# Allegro board COMPLETE SCHEMATIC V4.brd
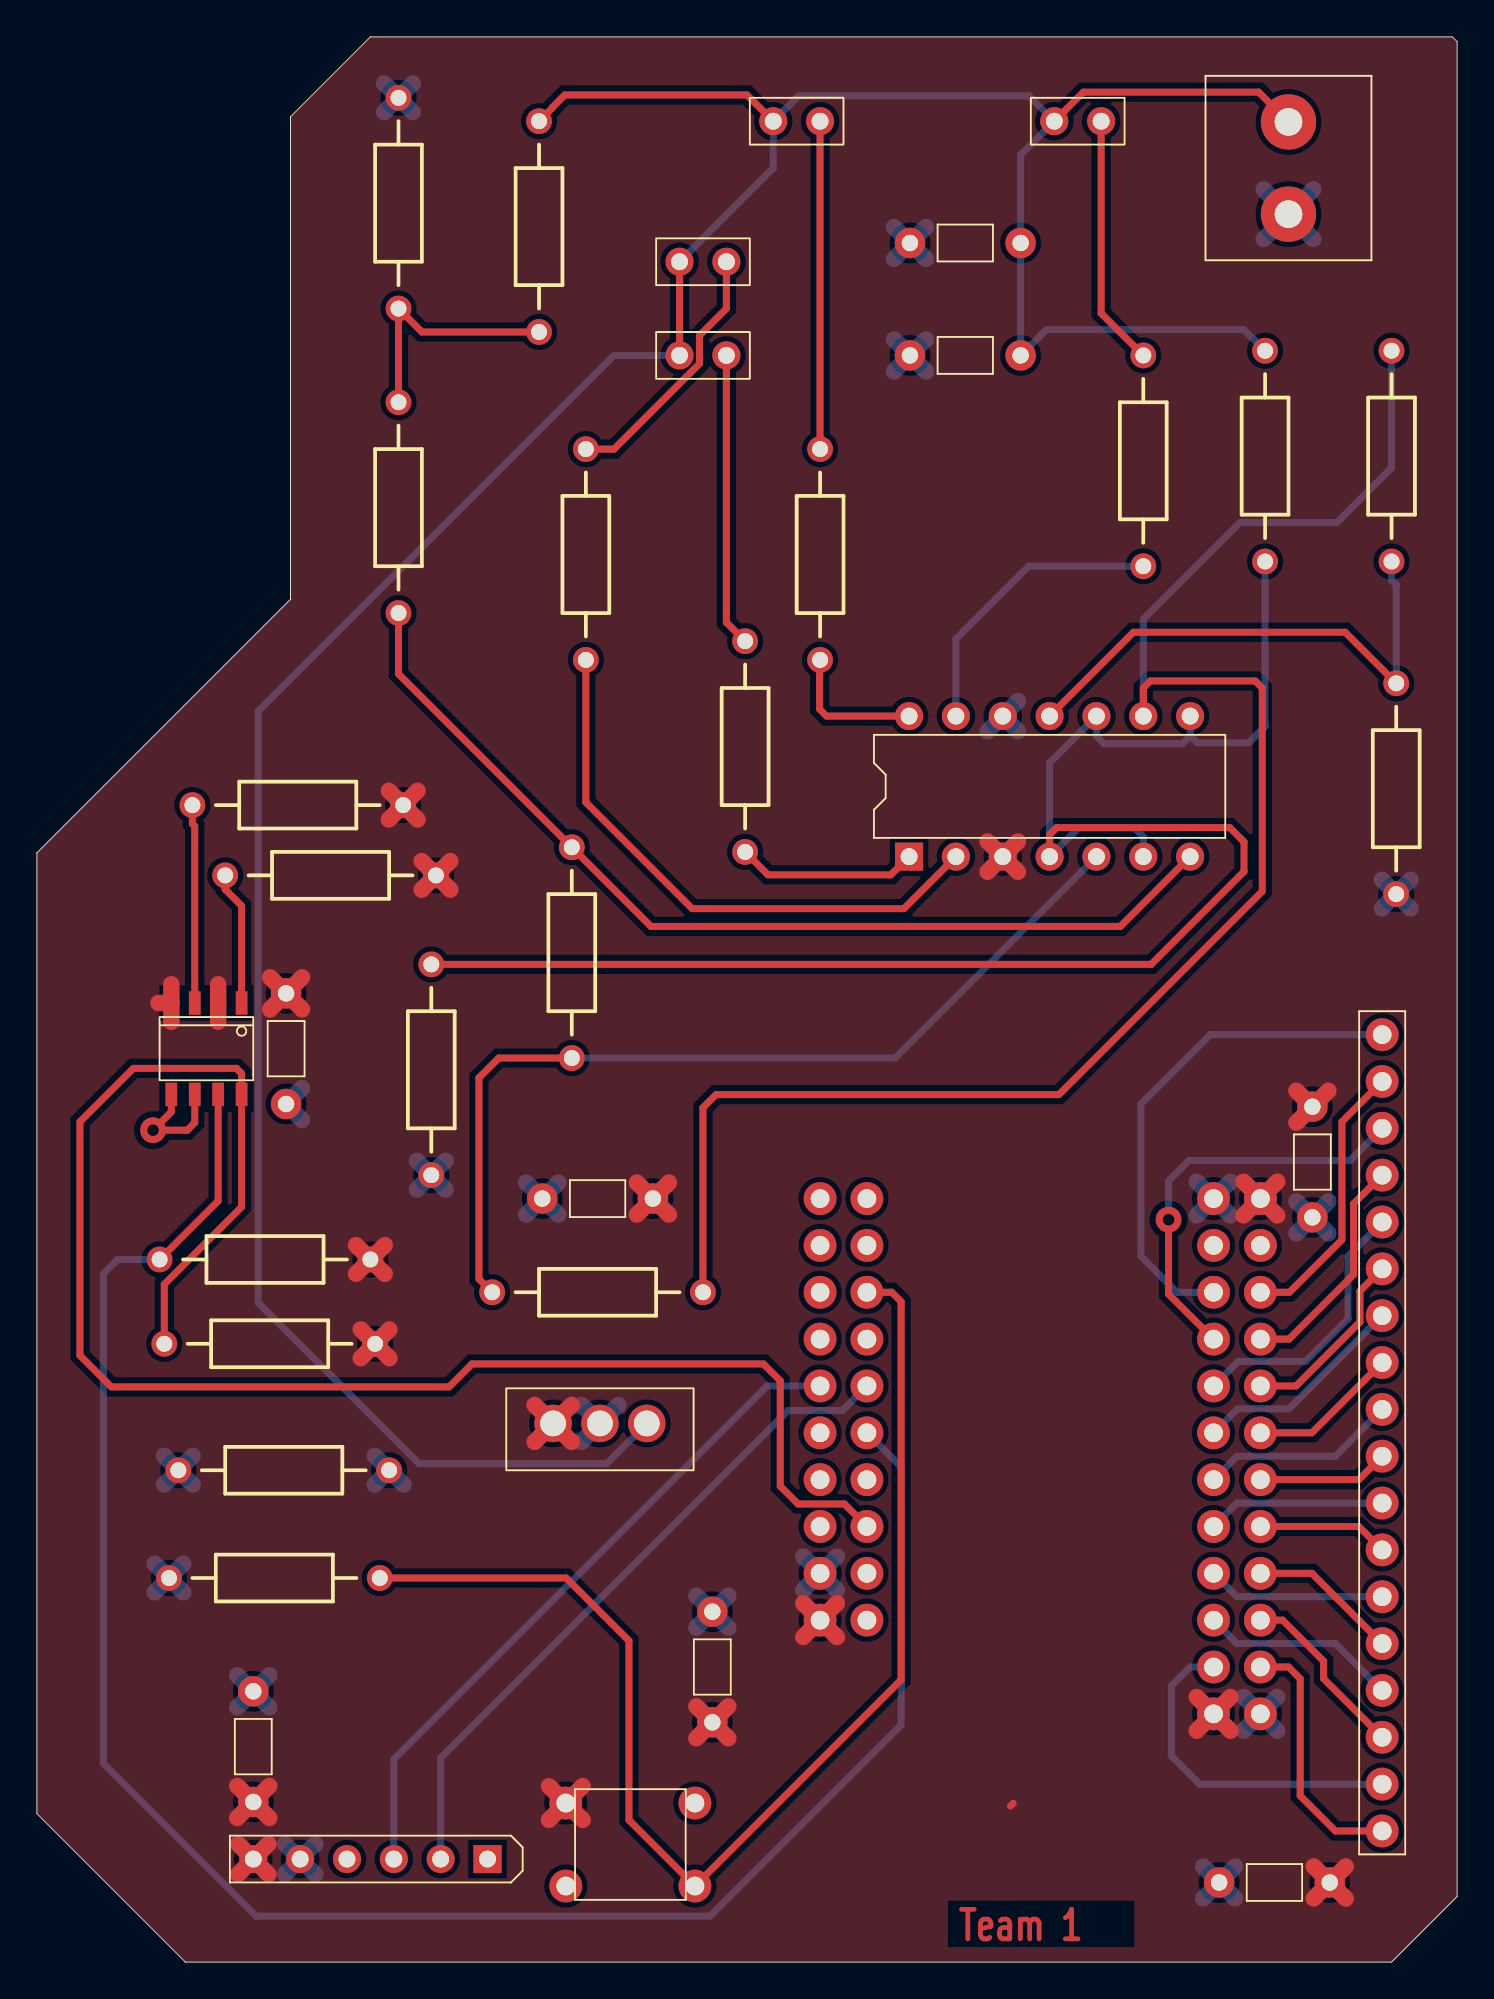
[diagram p0: board, top side]
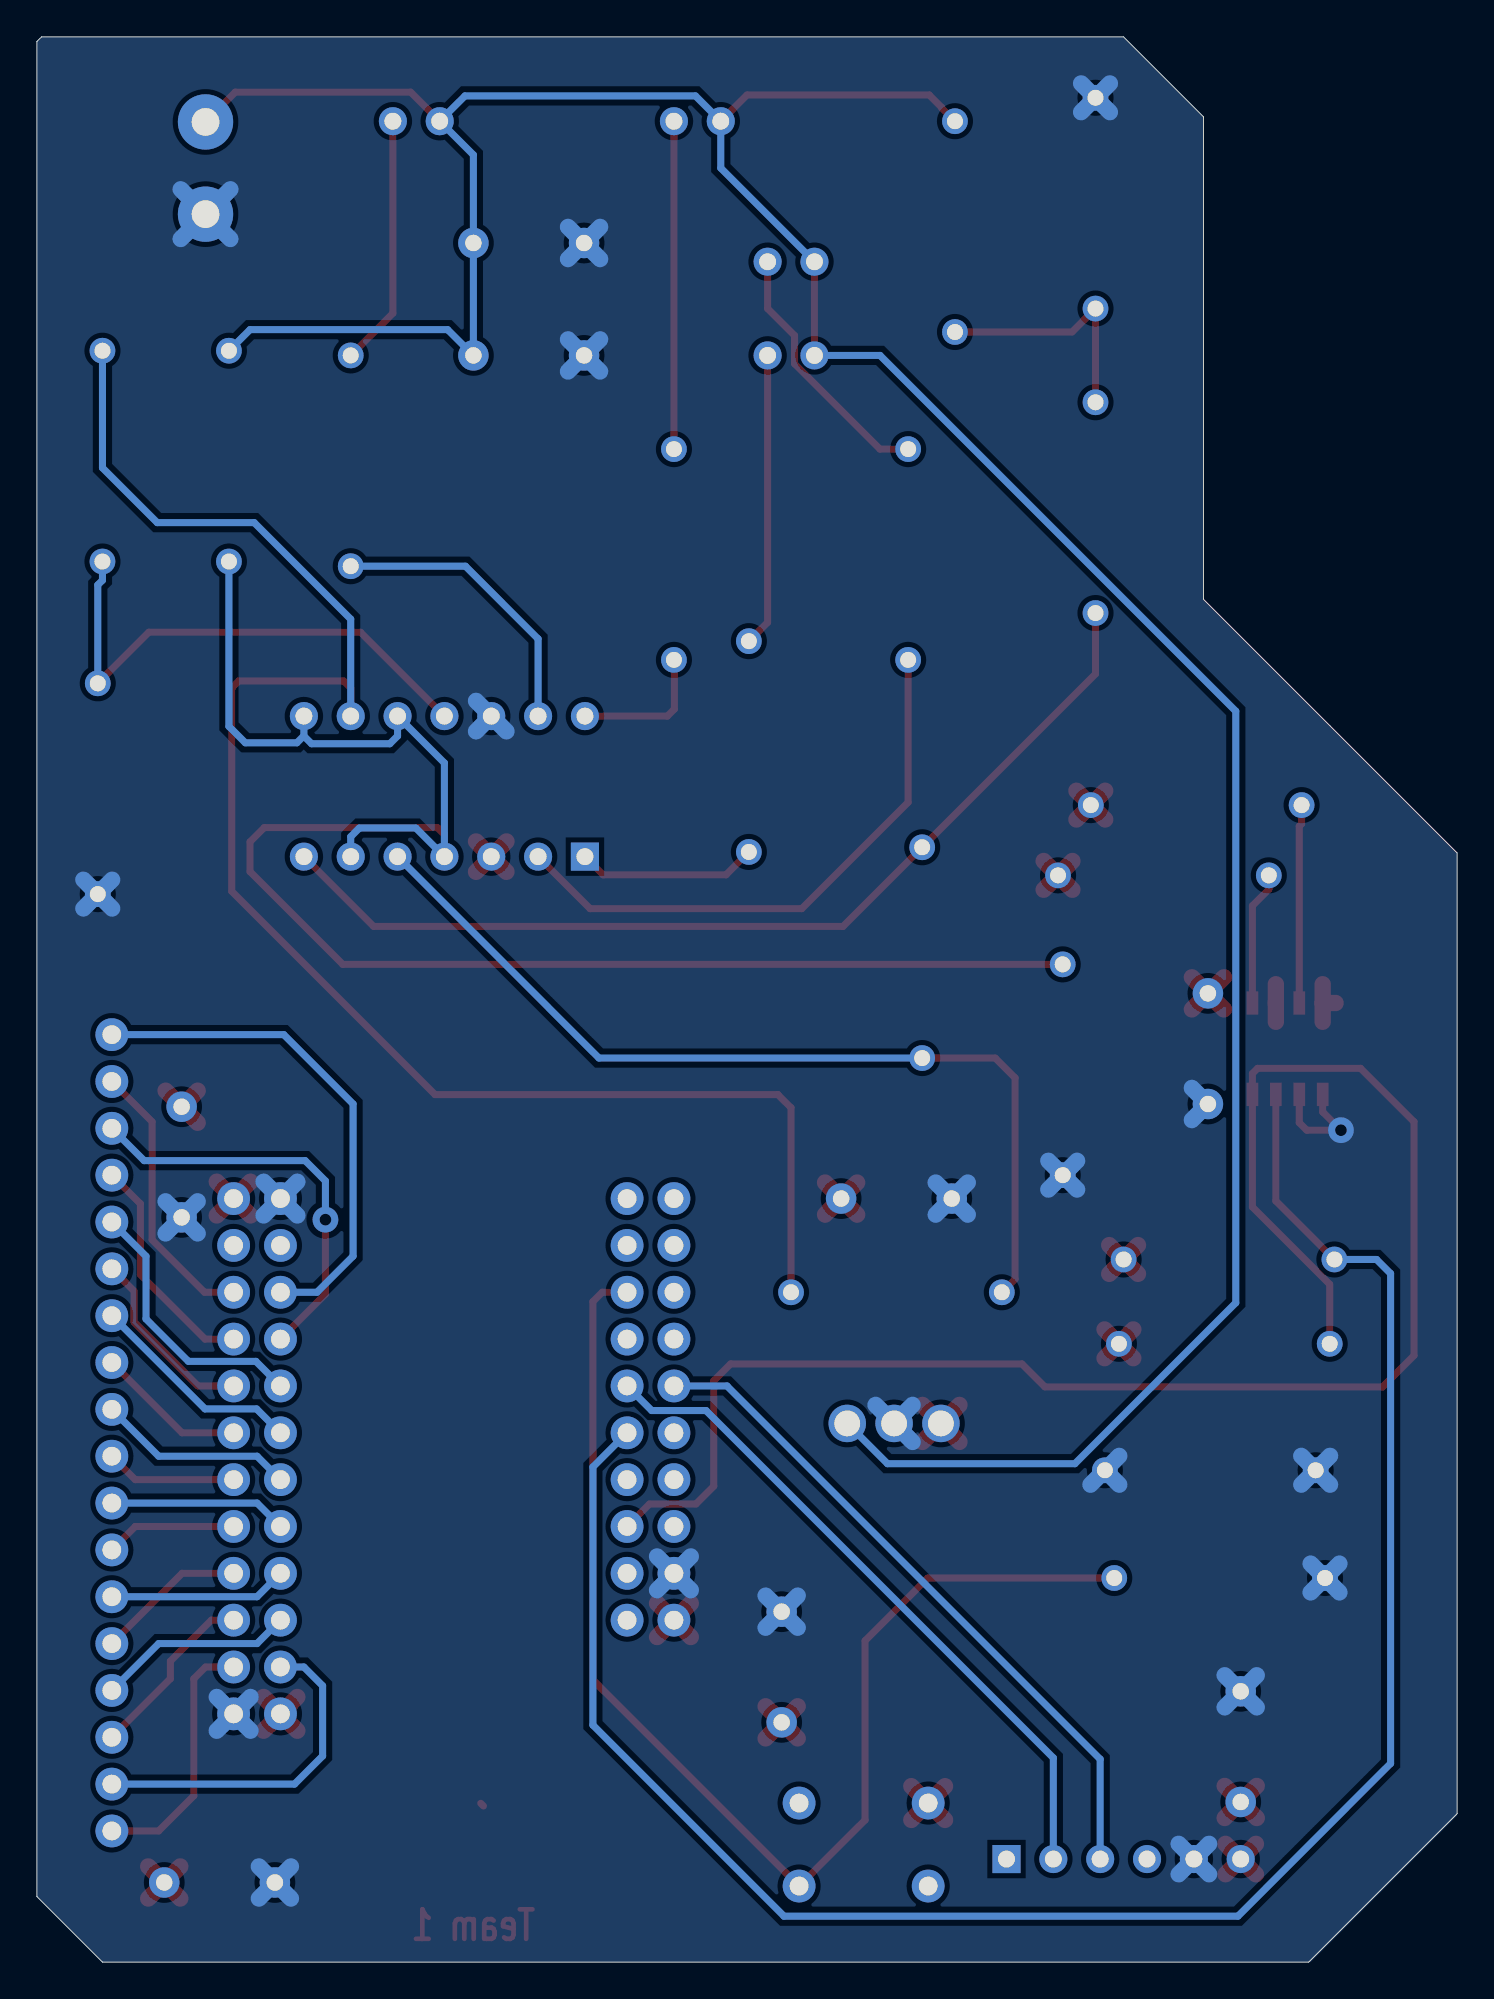
[diagram p1: board, bottom side, seen from below]

Outline 77.01 x 104.39 mm; copper layers: TOP, BOTTOM. Coordinates in mm from the lower left corner of the outline.
Outline path: 0,60.15 0,8.05 8.05,0 73.46,0 77.01,3.56 77.01,104.14 76.76,104.39 18.08,104.39 13.75,100.06 13.75,73.9 0,60.15

## Placement (name value [footprint] x y rotation side)
BT1  BATTERY  [2POS5MMCON]  67.87 97.28 0 top
C1  0.33uF 50V  [CAP1]  50.34 87.12 180 top
C2  0.1uF 50V  [CAP1]  30.4 41.4 180 top
C3  0.1uF 50V  [CAP1]  50.34 93.22 180 top
C4  0.1uF 50V  [CAP1]  36.63 16 90 top
C5  0.1 uF 50V  [CAP1]  69.16 43.38 270 top
C6  0.1uF 50V  [CAP1]  67.11 4.32 180 top
C7  0.1uF 50V  [CAP1]  11.73 11.68 270 top
C8  CAP NP  [CAP1]  13.51 49.53 270 top
D1  BLU  [JUMPER2]  34.85 87.12 0 top
D2  GRN  [JUMPER2]  34.85 92.2 0 top
D3  1N4733A  [AXRC07]  19.61 89.66 90 top
D4  YEL  [JUMPER2]  39.93 99.82 0 top
D5  RED  [JUMPER2]  55.17 99.82 0 top
D6  1N4001  [AXRC07]  7.67 26.67 0 top
J1  HEADER 6  [SIP6]  24.43 5.59 270 top
J2  HEADER 18  [HEADER_18]  72.95 28.7 0 top
R1  200 1/4W  [AXRC07]  27.23 99.82 270 top
R2  10k 1/4W  [AXRC07]  66.6 87.38 270 top
R3  500 1/4W  [AXRC07]  38.4 71.63 270 top
R4  2k 1/4W  [AXRC07]  19.61 84.58 270 top
R5  500 1/4W  [AXRC07]  29.77 82.04 270 top
R6  1k 1/4W  [AXRC07]  29.01 60.45 270 top
R7  470 1/4W  [AXRC07]  42.47 82.04 270 top
R8  1k 1/4W  [AXRC07]  24.69 36.32 0 top
R9  470 1/4W  [AXRC07]  59.99 87.12 270 top
R10  1k 1/4W  [AXRC07]  73.46 87.38 270 top
R11  12k 1/4W  [AXRC07]  73.71 69.34 270 top
R12  5k 1/4W  [AXRC07]  21.39 54.1 270 top
R13  10k 1/4W  [AXRC07]  18.59 20.83 180 top
R14  R  [AXRC07]  18.34 33.53 180 top
R15  R  [AXRC07]  18.08 38.1 180 top
R16  R  [AXRC07]  19.86 62.74 180 top
R17  R  [AXRC07]  21.64 58.93 180 top
SW1  SW PUSHBUTTON-SPST-2  [BUTTON]  32.18 6.38 0 top
U1  LM7805  [TO220AB]  33.07 29.21 0 top
U3  PSoC4BLE  [PSOC4BLE]  42.47 41.4 0 top
U4  LM339  [DIP14_3]  47.29 59.94 90 top
U5  ds3231  [SOIC8]  9.19 49.53 270 top

## Library data of the parts
BT1 = BATTERY
C1 C2 C4-C8 = CAP NP
C3 = C_0
D1 = LED_0: User Part Number: ***
D2 D4 D5 = LED_1: User Part Number: ***
D3 = DIODE ZENER_0
D6 = DIODE_0
J1 = HEADER 6_0: User Part Number: ***
J2 = HEADER 18
R1-R17 = R
SW1 = SW PUSHBUTTON-SPST-2
U1 = Linear regulator
U3 = PSoC4BLE_0
U4 = LM339_15: Tolerance: ***; User Part Number: ***
U5 = ds3231_0: Tolerance: ***; User Part Number: ***

## Footprints (pads in the part's own frame, mm; a bottom-side part is the same pattern mirrored in y, then rotated)
2POS5MMCON
  round 3 hole 1.5: 1(0,2.5) 2(0,-2.5)
AXRC07
  round 1.397 hole 0.864: 1(0,0) 2(11.43,0)
BUTTON
  round 1.778 hole 1.016: 1(-3.5,2.25) 2(-3.5,-2.25) 3(3.5,-2.25) 4(3.5,2.25)
CAP1
  round 1.651 hole 0.889: 1(-3,0) 2(3,0)
DIP14_3
  rect 1.524x1.524 hole 0.914: 1(0,0)
  round 1.524 hole 0.914: 2(0,-2.54) 3(0,-5.08) 4(0,-7.62) 5(0,-10.16) 6(0,-12.7) 7(0,-15.24) 8(7.62,-15.24) 9(7.62,-12.7) 10(7.62,-10.16) 11(7.62,-7.62) 12(7.62,-5.08) 13(7.62,-2.54) 14(7.62,0)
HEADER_18
  round 1.778 hole 1.016: 1(0,21.59) 2(0,19.05) 3(0,16.51) 4(0,13.97) 5(0,11.43) 6(0,8.89) 7(0,6.35) 8(0,3.81) 9(0,1.27) 10(0,-1.27) 11(0,-3.81) 12(0,-6.35) 13(0,-8.89) 14(0,-11.43) 15(0,-13.97) 16(0,-16.51) 17(0,-19.05) 18(0,-21.59)
JUMPER2
  round 1.524 hole 0.914: 1(0,0) 2(2.54,0)
PSOC4BLE
  round 1.778 hole 1.016: 1(2.54,-22.86) 2(0,-22.86) 3(2.54,-20.32) 4(0,-20.32) 5(2.54,-17.78) 6(0,-17.78) 7(2.54,-15.24) 8(0,-15.24) 9(2.54,-12.7) 10(0,-12.7) 11(2.54,-10.16) 12(0,-10.16) 13(2.54,-7.62) 14(0,-7.62) 15(2.54,-5.08) 16(0,-5.08) 17(2.54,-2.54) 18(0,-2.54) 19(2.54,0) 20(0,0) 21(21.336,0) 22(23.876,0) 23(21.336,-2.54) 24(23.876,-2.54) 25(21.336,-5.08) 26(23.876,-5.08) 27(21.336,-7.62) 28(23.876,-7.62) 29(21.336,-10.16) 30(23.876,-10.16) 31(21.336,-12.7) 32(23.876,-12.7) 33(21.336,-15.24) 34(23.876,-15.24) 35(21.336,-17.78) 36(23.876,-17.78) 37(21.336,-20.32) 38(23.876,-20.32) 39(21.336,-22.86) 40(23.876,-22.86) 41(21.336,-25.4) 42(23.876,-25.4) 43(21.336,-27.94) 44(23.876,-27.94)
SIP6
  rect 1.524x1.524 hole 0.914: 1(0,0)
  round 1.524 hole 0.914: 2(0,-2.54) 3(0,-5.08) 4(0,-7.62) 5(0,-10.16) 6(0,-12.7)
SOIC8
  rect 1.27x0.635 smd: 1(-2.477,1.905) 2(-2.477,0.635) 3(-2.477,-0.635) 4(-2.477,-1.905) 5(2.477,-1.905) 6(2.477,-0.635) 7(2.477,0.635) 8(2.477,1.905)
TO220AB
  round 2.032 hole 1.397: 1(0,0) 2(-2.54,0) 3(-5.08,0)

## Nets
+VBAT: BT1.1(+) C1.1 C3.1 D1.1 D2.1 D4.1 D5.1 R1.1 R2.1 U1.1(INPUT)
GND: BT1.2(-) C1.2 C2.2 C3.2 C4.2 C5.2 C6.2 C7.1 C8.2 D3.2(ANODE) D6.1 D6.2 J1.5(GND) R11.2 R12.2 R13.2 U1.2(GEOUND) U3.4(GND1) U3.21(GND2) U3.44(GND3) U4.12 U5.5(GND) U5.6(VBAT)
+5 V: C2.1 C4.1 C5.1 C6.1 C7.2 C8.1 J1.6(VCC) R14.1 R15.1 R16.1 R17.1 SW1.1 U1.3(OUTPUT) U3.2(VDDD) U3.22(VDDA) U3.43(VDDR) U4.3 U5.2(VCC) U5.4(R\S\T\)
RXD: J1.2(RXD) U3.11(P1.1)
SCL: R14.2 U3.5(P1.5) U5.8(SCL)
SDA: R15.2 U3.9(P1.4) U5.7(SDA)
TXD: J1.3(TXD) U3.12(P1.2)
N56194: R3.2 U4.1(OUT)
N56202: R5.2 U4.2(OUT)
N56210: R7.2 U4.14(OUT)
N56218: R9.2 U4.13(OUT)
N56230: D3.1(CATHODE) R1.2 R4.1
N56234: R4.2 R6.1 U4.7(+IN)
N56238: R6.2 R8.1 U4.5(+IN)
N56242: R8.2 R10.1 U4.9(+IN)
N56246: R2.2 R12.1 U4.4(-IN) U4.6(-IN) U4.8(-IN) U4.10(-IN)
N56362: R10.2 R11.1 U4.11(+IN)
N56366: D2.2 R5.1
N56370: D4.2 R7.1
N56374: D5.2 R9.1
N56918: R13.1 SW1.3 U3.15(P0.4)
N57246: J2.18 U3.42(P2.1)
N57250: J2.17 U3.41(P2.0)
N57254: J2.16 U3.40(P2.3)
N57258: J2.15 U3.39(P2.2)
N57262: J2.14 U3.38(P2.5)
N57266: J2.13 U3.37(P2.4)
N57270: J2.12 U3.36(P2.7)
N57274: J2.11 U3.35(P2.6)
N57278: J2.10 U3.34(P5.0)
N57282: J2.9 U3.33(P4.1)
N57286: J2.8 U3.32(P5.1)
N57290: J2.7 U3.31(P4.0)
N57294: J2.6 U3.30(P3.1)
N57298: J2.5 U3.29(P3.0)
N57318: J2.4 U3.28(P3.3)
N57322: J2.3 U3.27(P3.2)
N57332: J2.2 U3.26(P3.5)
N57336: J2.1 U3.25(P3.4)
N86841: R16.2 U5.3(I\N\T\/SQW)
N86845: R17.2 U5.1(32KHZ)
N561581: D1.2 R3.1

Pads without a net: J1 1 4; SW1 2 4; U3 1 3 6 7 8 10 13 14 16 17 18 19 20 23 24

## Via types
v1: diameter 1.397, hole 0.635, TOP to BOTTOM, 2 vias

## Routing (per net, layer and track width the routed paths; a pad name or vN(x,y) marks a point on that pad's centre or on a via; arc(x,y) is an arc through that point)
+VBAT: length 175.4
  TOP w0.381: D1.1 D2.1 ; BT1.1 66.25,101.4 56.74,101.4 D5.1 ; D4.1 38.51,101.24 28.63,101.24 27.95,100.57 27.95,100.54 R1.1
  BOTTOM w0.381: U1.1 30.89,27.03 20.73,27.03 12,35.75 12,67.83 31.29,87.12 D1.1 ; D2.1 39.93,97.28 D4.1 41.3,101.19 53.8,101.19 D5.1 53.34,98 C3.1 C1.1 54.74,88.52 65.46,88.52 R2.1
GND: length 104
  TOP w0.381: U5.6 8.56,45.52 8.15,45.11 v1(6.3,45.11) 7.29,46.1 U5.5
  BOTTOM w0.889: U3.44 67.26,14.38 ; U3.44 65.43,12.55 ; U3.44 65.43,14.38 ; U3.44 67.26,12.55 ; 46.47,94.09 C3.2 ; C3.2 48.21,92.35 ; C3.2 46.47,92.35 ; C3.2 48.21,94.09 ; D3.2 20.39,101.87 ; D3.2 18.83,100.31 ; D3.2 18.83,101.87 ; D3.2 20.39,100.31 ; R13.2 7.94,21.61 ; R13.2 6.38,21.61 ; R13.2 7.94,20.05 ; R13.2 6.38,20.05 ; C6.2 64.98,3.45 ; C6.2 64.98,5.19 ; C6.2 63.24,5.19 ; C6.2 63.24,3.45 ; BT1.2 69.21,96.13 ; BT1.2 66.52,93.44 ; BT1.2 69.21,93.44 ; BT1.2 66.52,96.13 ; 46.47,86.25 C1.2 ; C1.2 48.21,87.99 ; C1.2 46.47,87.99 ; C1.2 48.21,86.25 ; J1.5 15.1,4.76 ; J1.5 13.45,6.41 ; J1.5 13.45,4.76 ; J1.5 15.1,6.41 ; 14.38,45.66 C8.2 14.38,47.4 ; 41.56,22 U3.4 ; U3.4 41.56,20.17 ; U3.4 43.38,22 ; U3.4 43.38,20.17 ; C4.2 37.5,19.87 ; C4.2 35.76,18.13 ; C4.2 37.5,18.13 ; C4.2 35.76,19.87 ; D6.1 8.45,25.89 ; D6.1 6.89,27.45 ; D6.1 8.45,27.45 ; D6.1 6.89,25.89 ; R12.2 22.17,43.45 ; R12.2 20.61,41.89 ; R12.2 20.61,43.45 ; R12.2 22.17,41.89 ; C7.1 12.6,13.82 ; C7.1 12.6,15.55 ; C7.1 10.87,15.55 ; C7.1 10.87,13.82 ; 26.54,40.53 C2.2 ; C2.2 28.27,42.27 ; C2.2 28.27,40.53 ; C2.2 26.54,42.27 ; R11.2 74.49,58.69 ; R11.2 74.49,57.13 ; R11.2 72.93,58.69 ; R11.2 72.93,57.13 ; 62.89,42.32 U3.21 ; U3.21 64.72,40.49 ; U3.21 62.89,40.49 ; U3.21 64.72,42.32 ; D6.2 19.88,25.89 ; D6.2 18.32,25.89 ; D6.2 18.32,27.45 ; U4.12 53.2,66.74 ; U4.12 51.55,66.74 ; U4.12 53.2,68.39 ; U1.2 31.53,30.21 ; U1.2 29.53,30.21 ; U1.2 29.53,28.21 ; C5.2 70.03,39.51 ; C5.2 70.03,41.25 ; C5.2 68.3,41.25 ; C5.2 68.3,39.51
+5 V: length 86.5
  TOP w0.381: 52.94,8.61 52.8,8.47
  TOP w0.889: C8.1 14.38,51.66 ; C8.1 12.64,51.66 ; C8.1 14.38,53.4 ; C8.1 12.64,53.4 ; 69.24,5.19 C6.1 ; C6.1 70.98,5.19 ; C6.1 69.24,3.45 ; C6.1 70.98,3.45 ; C4.1 37.5,12.13 ; C4.1 35.76,12.13 ; C4.1 37.5,13.87 ; C4.1 35.76,13.87 ; 65.43,42.32 U3.22 ; U3.22 65.43,40.49 ; U3.22 67.26,42.32 ; U3.22 67.26,40.49 ; J1.6 12.56,4.76 ; J1.6 10.91,4.76 ; J1.6 12.56,6.41 ; J1.6 10.91,6.41 ; 32.54,40.53 C2.1 ; C2.1 32.54,42.27 ; C2.1 34.27,40.53 ; C2.1 34.27,42.27 ; 19.08,61.96 R16.1 ; R16.1 19.08,63.52 ; R16.1 20.64,61.96 ; R16.1 20.64,63.52 ; U3.43 64.72,12.55 ; U3.43 64.72,14.38 ; U3.43 62.89,12.55 ; U3.43 62.89,14.38 ; 9.83,50.99 U5.2 9.83,53.02 ; R17.1 22.42,59.71 ; R17.1 20.86,58.15 ; R17.1 20.86,59.71 ; R17.1 22.42,58.15 ; SW1.1 29.6,9.54 ; SW1.1 27.77,9.54 ; SW1.1 29.6,7.71 ; SW1.1 27.77,7.71 ; U4.3 53.2,59.12 ; U4.3 53.2,60.77 ; U4.3 51.55,59.12 ; U4.3 51.55,60.77 ; U5.4 7.29,53.02 ; U5.4 7.29,50.99 ; U5.4 6.59,52.01 ; 26.99,30.21 U1.3 ; U1.3 28.99,30.21 ; U1.3 28.99,28.21 ; U1.3 26.99,28.21 ; 10.87,9.55 C7.2 ; C7.2 10.87,7.82 ; C7.2 12.6,7.82 ; C7.2 12.6,9.55 ; 68.3,47.25 C5.1 ; C5.1 70.03,47.25 ; C5.1 68.3,45.51 ; U3.2 43.38,19.46 ; U3.2 41.56,19.46 ; U3.2 41.56,17.63 ; U3.2 43.38,17.63 ; R15.1 18.86,37.32 ; R15.1 17.31,38.88 ; R15.1 17.31,37.32 ; R15.1 18.86,38.88 ; 17.56,34.31 R14.1 ; R14.1 19.12,34.31 ; R14.1 19.12,32.75 ; R14.1 17.56,32.75
RXD: length 37
  BOTTOM w0.381: U3.11 43.68,29.91 40.73,29.91 21.89,11.07 J1.2
SCL: length 90
  TOP w0.381: R14.2 6.91,36.75 11.1,40.94 U5.8 11.1,48.18 10.82,48.46 5.23,48.46 2.34,45.57 2.34,32.89 4.04,31.19 22.35,31.19 23.6,32.44 39.4,32.44 40.31,31.52 40.31,25.81 41.28,24.84 43.79,24.84 U3.5
SDA: length 107.8
  TOP w0.381: U5.7 9.83,41.27 R15.2
  BOTTOM w0.381: R15.2 4.37,38.1 3.61,37.34 3.61,10.77 11.89,2.49 36.5,2.49 46.86,12.85 46.86,26.85 U3.9
TXD: length 36.9
  BOTTOM w0.381: J1.3 19.35,11.01 39.59,31.24 U3.12
N56194: length 9.8
  TOP w0.381: R3.2 39.65,58.96 46.31,58.96 U4.1
N56202: length 31.3
  TOP w0.381: R5.2 29.77,62.89 35.53,57.12 47.02,57.12 U4.2
N56210: length 7.7
  TOP w0.381: U4.14 42.82,67.56 42.44,67.94 42.44,70.59 R7.2
N56218: length 16
  BOTTOM w0.381: R9.2 53.77,75.69 49.83,71.75 U4.13
N56230: length 13.2
  TOP w0.381: R1.2 20.88,88.39 D3.1 R4.1
N56234: length 53.5
  TOP w0.381: R4.2 19.61,69.85 R6.1 33.3,56.16 58.75,56.16 U4.7
N56238: length 50.4
  TOP w0.381: R6.2 25.04,49.02 23.97,47.95 23.97,37.04 R8.1
  BOTTOM w0.381: U4.5 46.53,49.02 R6.2
N56242: length 93
  TOP w0.381: U4.9 59.99,69.09 60.38,69.47 66.07,69.47 66.45,69.09 66.45,58.06 55.42,47.04 36.83,47.04 36.12,46.33 R8.2
  BOTTOM w0.381: U4.9 59.99,72.82 65.23,78.05 70.48,78.05 73.46,81.03 R10.1
N56246: length 96.8
  TOP w0.381: U4.4 54.91,61.14 55.3,61.52 64.68,61.52 65.46,60.74 65.46,59.13 60.43,54.1 R12.1
  BOTTOM w0.381: 62.53,66.5 U4.8 ; 62.53,66.5 62.92,66.12 65.71,66.12 66.6,67.01 R2.2 ; 62.53,66.5 62.53,66.48 62.12,66.07 57.87,66.07 57.45,66.48 U4.10 54.91,65.02 U4.4 56.46,61.49 59.52,61.49 59.99,61.02 U4.6
N56362: length 28.5
  TOP w0.381: R11.1 70.94,72.11 59.46,72.11 U4.11
  BOTTOM w0.381: R11.1 73.71,74.68 73.46,74.93 R10.2
N56366: length 14.2
  TOP w0.381: D2.2 37.39,89.66 35.93,88.2 35.93,86.67 31.3,82.04 R5.1
N56370: length 17.8
  TOP w0.381: R7.1 D4.2
N56374: length 13.6
  TOP w0.381: D5.2 57.71,89.41 R9.1
N56918: length 68.1
  TOP w0.381: U3.15 46.36,36.32 46.86,35.81 46.86,15.31 SW1.3 32.11,7.7 32.11,17.42 28.7,20.83 R13.1
N57246: length 14
  TOP w0.381: U3.42 67.87,16 68.5,15.37 68.5,9.02 70.41,7.11 J2.18
N57250: length 18.6
  BOTTOM w0.381: J2.17 63.04,9.65 61.52,11.18 61.52,14.99 62.53,16 U3.41
N57254: length 9.8
  TOP w0.381: J2.16 69.77,15.37 69.77,16.32 67.55,18.54 U3.40
N57258: length 10.7
  BOTTOM w0.381: U3.39 65.07,17.27 70.41,17.27 J2.15
N57262: length 8.2
  TOP w0.381: U3.38 69.14,21.08 J2.14
N57266: length 9.7
  BOTTOM w0.381: J2.13 65.07,19.81 U3.37
N57270: length 7.1
  TOP w0.381: J2.12 71.68,23.62 U3.36
N57274: length 9.7
  BOTTOM w0.381: U3.35 65.07,24.89 J2.11
N57278: length 7.1
  TOP w0.381: U3.34 71.68,26.16 J2.10
N57282: length 10.7
  BOTTOM w0.381: U3.33 65.07,27.43 70.41,27.43 J2.9
N57286: length 8.2
  TOP w0.381: J2.8 69.14,28.7 U3.32
N57290: length 11.8
  BOTTOM w0.381: J2.7 67.89,30 65.1,30 U3.31
N57294: length 10.2
  TOP w0.381: U3.30 68.28,31.24 71.74,34.71 71.74,36.39 J2.6
N57298: length 14.8
  BOTTOM w0.381: U3.29 65.14,32.58 68.8,32.58 71.09,34.87 71.09,38.28 J2.5
N57318: length 12.5
  TOP w0.381: J2.4 71.4,41.12 71.4,37.29 67.89,33.78 U3.28
N57322: length 22.4
  TOP w0.381: v1(61.37,40.26) 61.37,36.22 U3.27
  BOTTOM w0.381: v1(61.37,40.26) 61.37,42.36 62.47,43.46 71.2,43.46 J2.3
N57332: length 15.1
  TOP w0.381: J2.2 70.76,45.57 70.76,39.17 67.92,36.32 U3.26
N57336: length 27.6
  BOTTOM w0.381: J2.1 63.63,50.29 59.87,46.53 59.87,38.28 61.82,36.32 U3.25
N86841: length 10.8
  TOP w0.381: U5.3 8.56,61.59 8.43,61.72 R16.2
N86845: length 7.3
  TOP w0.381: U5.1 11.1,57.28 10.21,58.17 R17.2
N561581: length 15.9
  TOP w0.381: D1.2 37.39,72.64 R3.1

## Copper pours and planes (outline as drawn; the poured copper is in the pictures)
GND on BOTTOM: 77.01,3.56 77.01,104.14 76.76,104.39 18.08,104.39 13.77,100.08 13.77,73.91 0,60.15 0,7.95 7.95,0 73.46,0
+5 V on TOP: 77.01,3.56 77.01,104.14 76.76,104.39 18.08,104.39 13.75,100.06 13.75,73.9 0,60.15 0,8.05 8.05,0 73.46,0

## Text on the board
TOP: Team 1
